# Altium PCB PCB.PcbDoc (part 1 of 2)
Units mm, origin at the board's own origin, x right, y up, seen from the top; angles counter-clockwise.
Board outline 200.03 x 130.81 mm, 2 copper layers (Top Layer, Bottom Layer); 172 components, 135 nets, 513 pads, 0 vias.
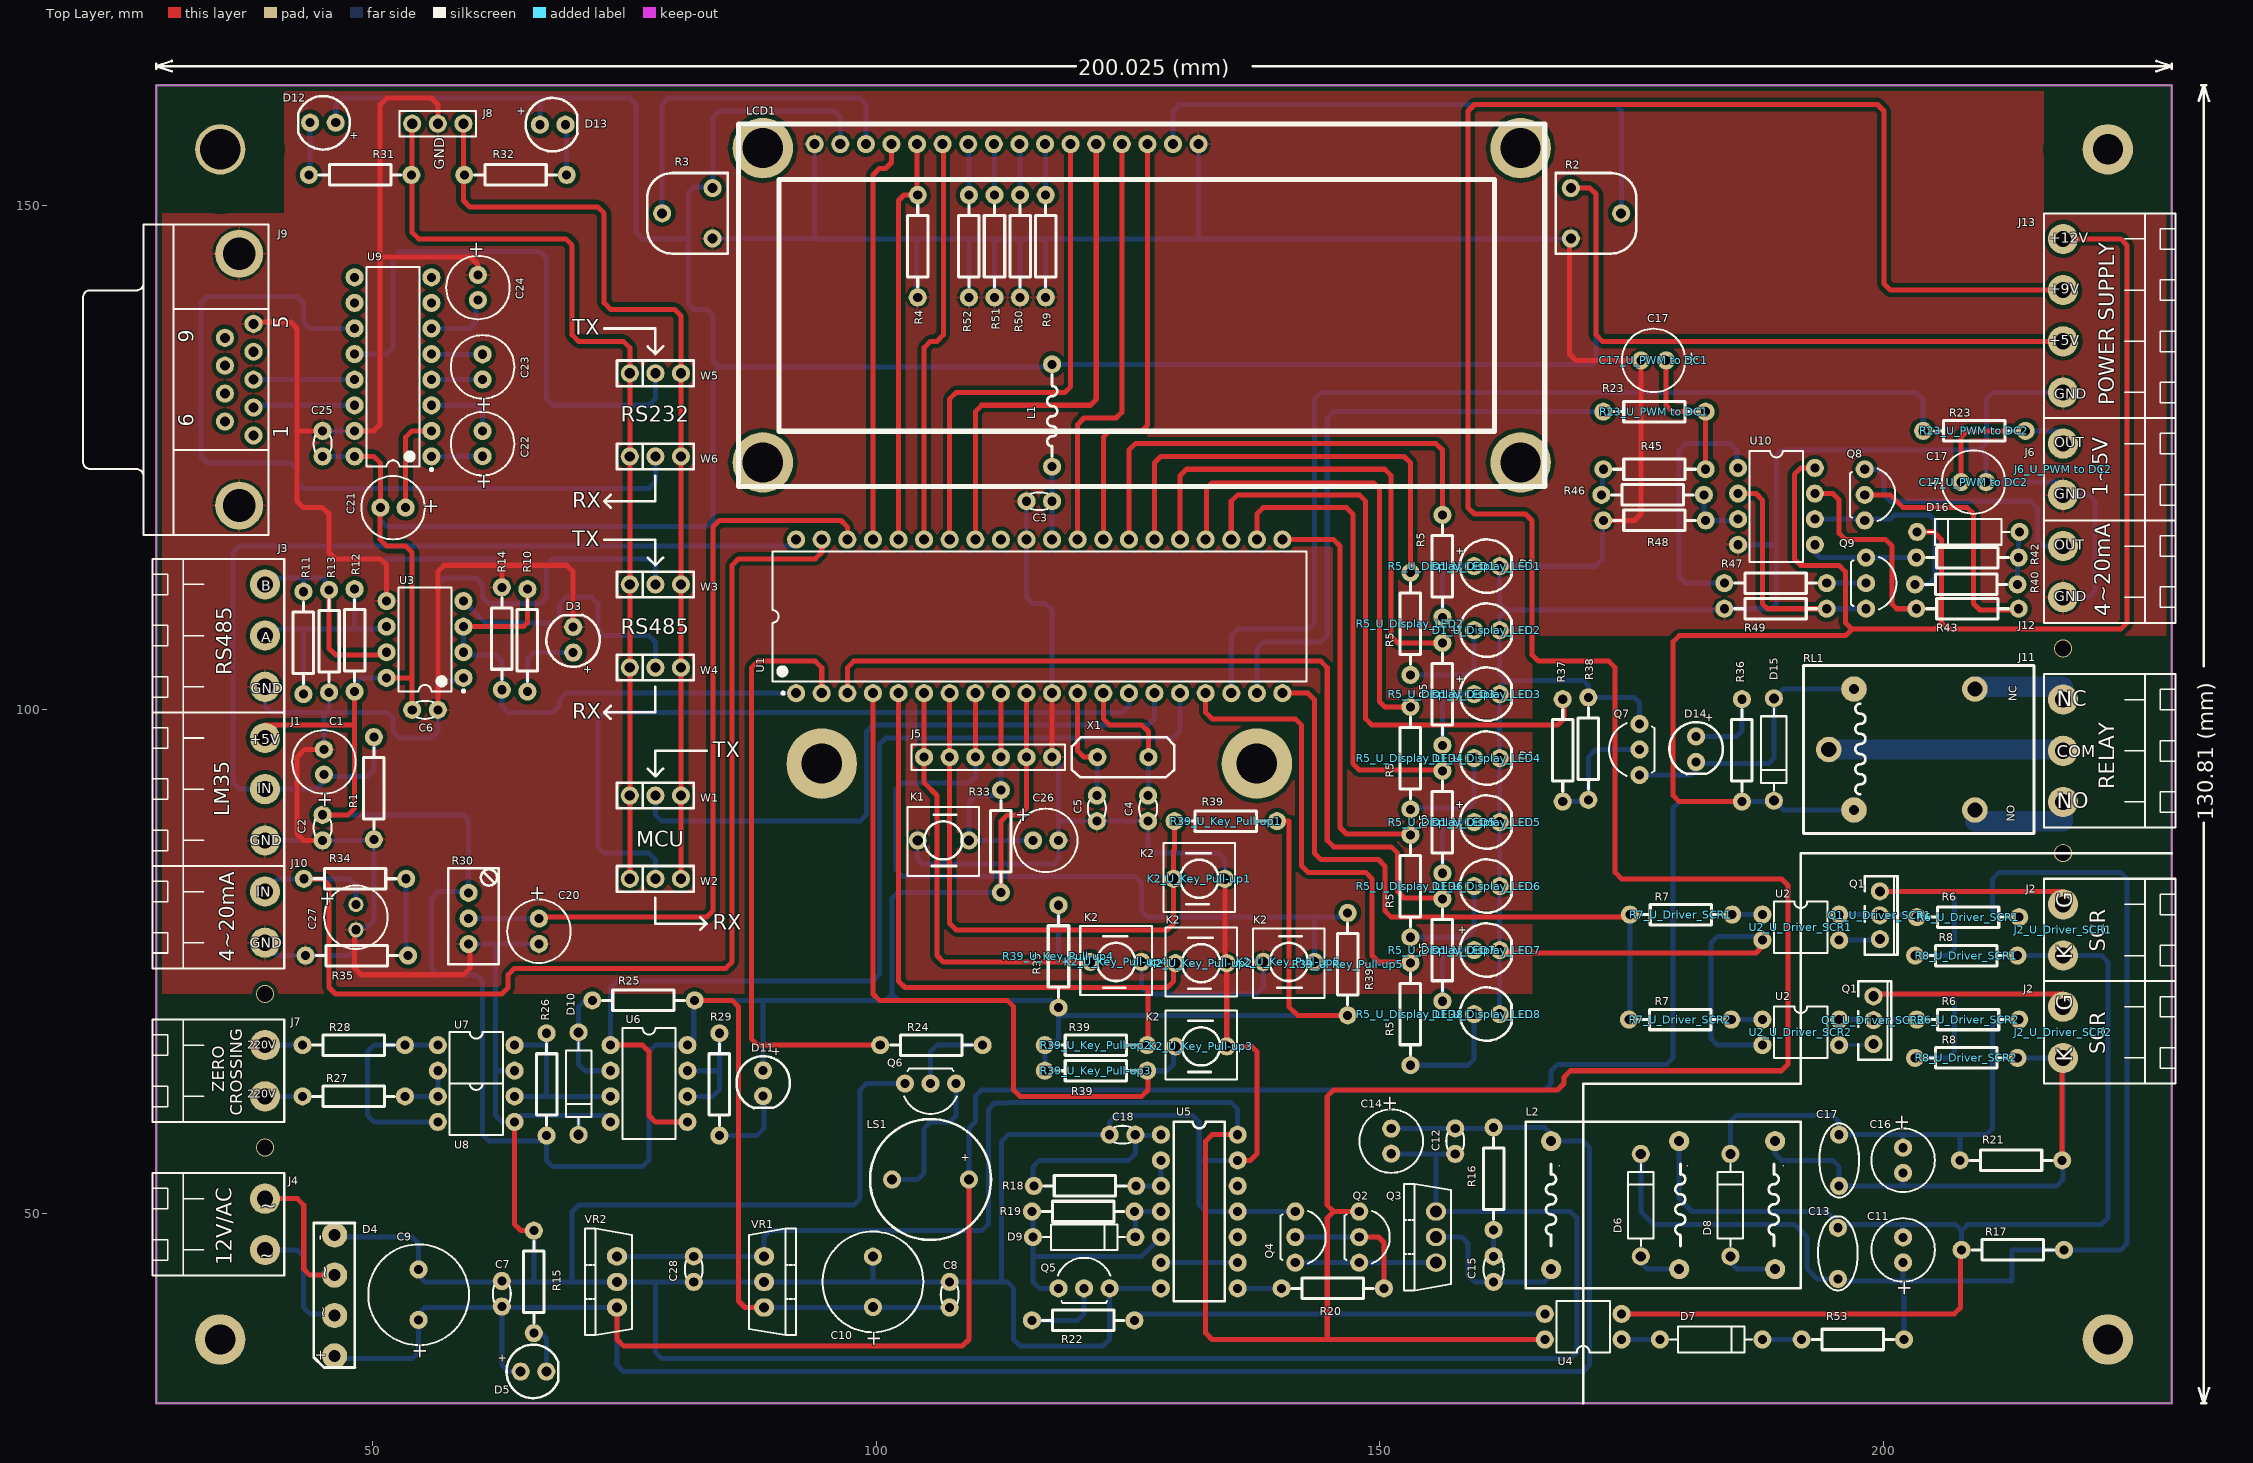
[diagram p0: Top Layer view]
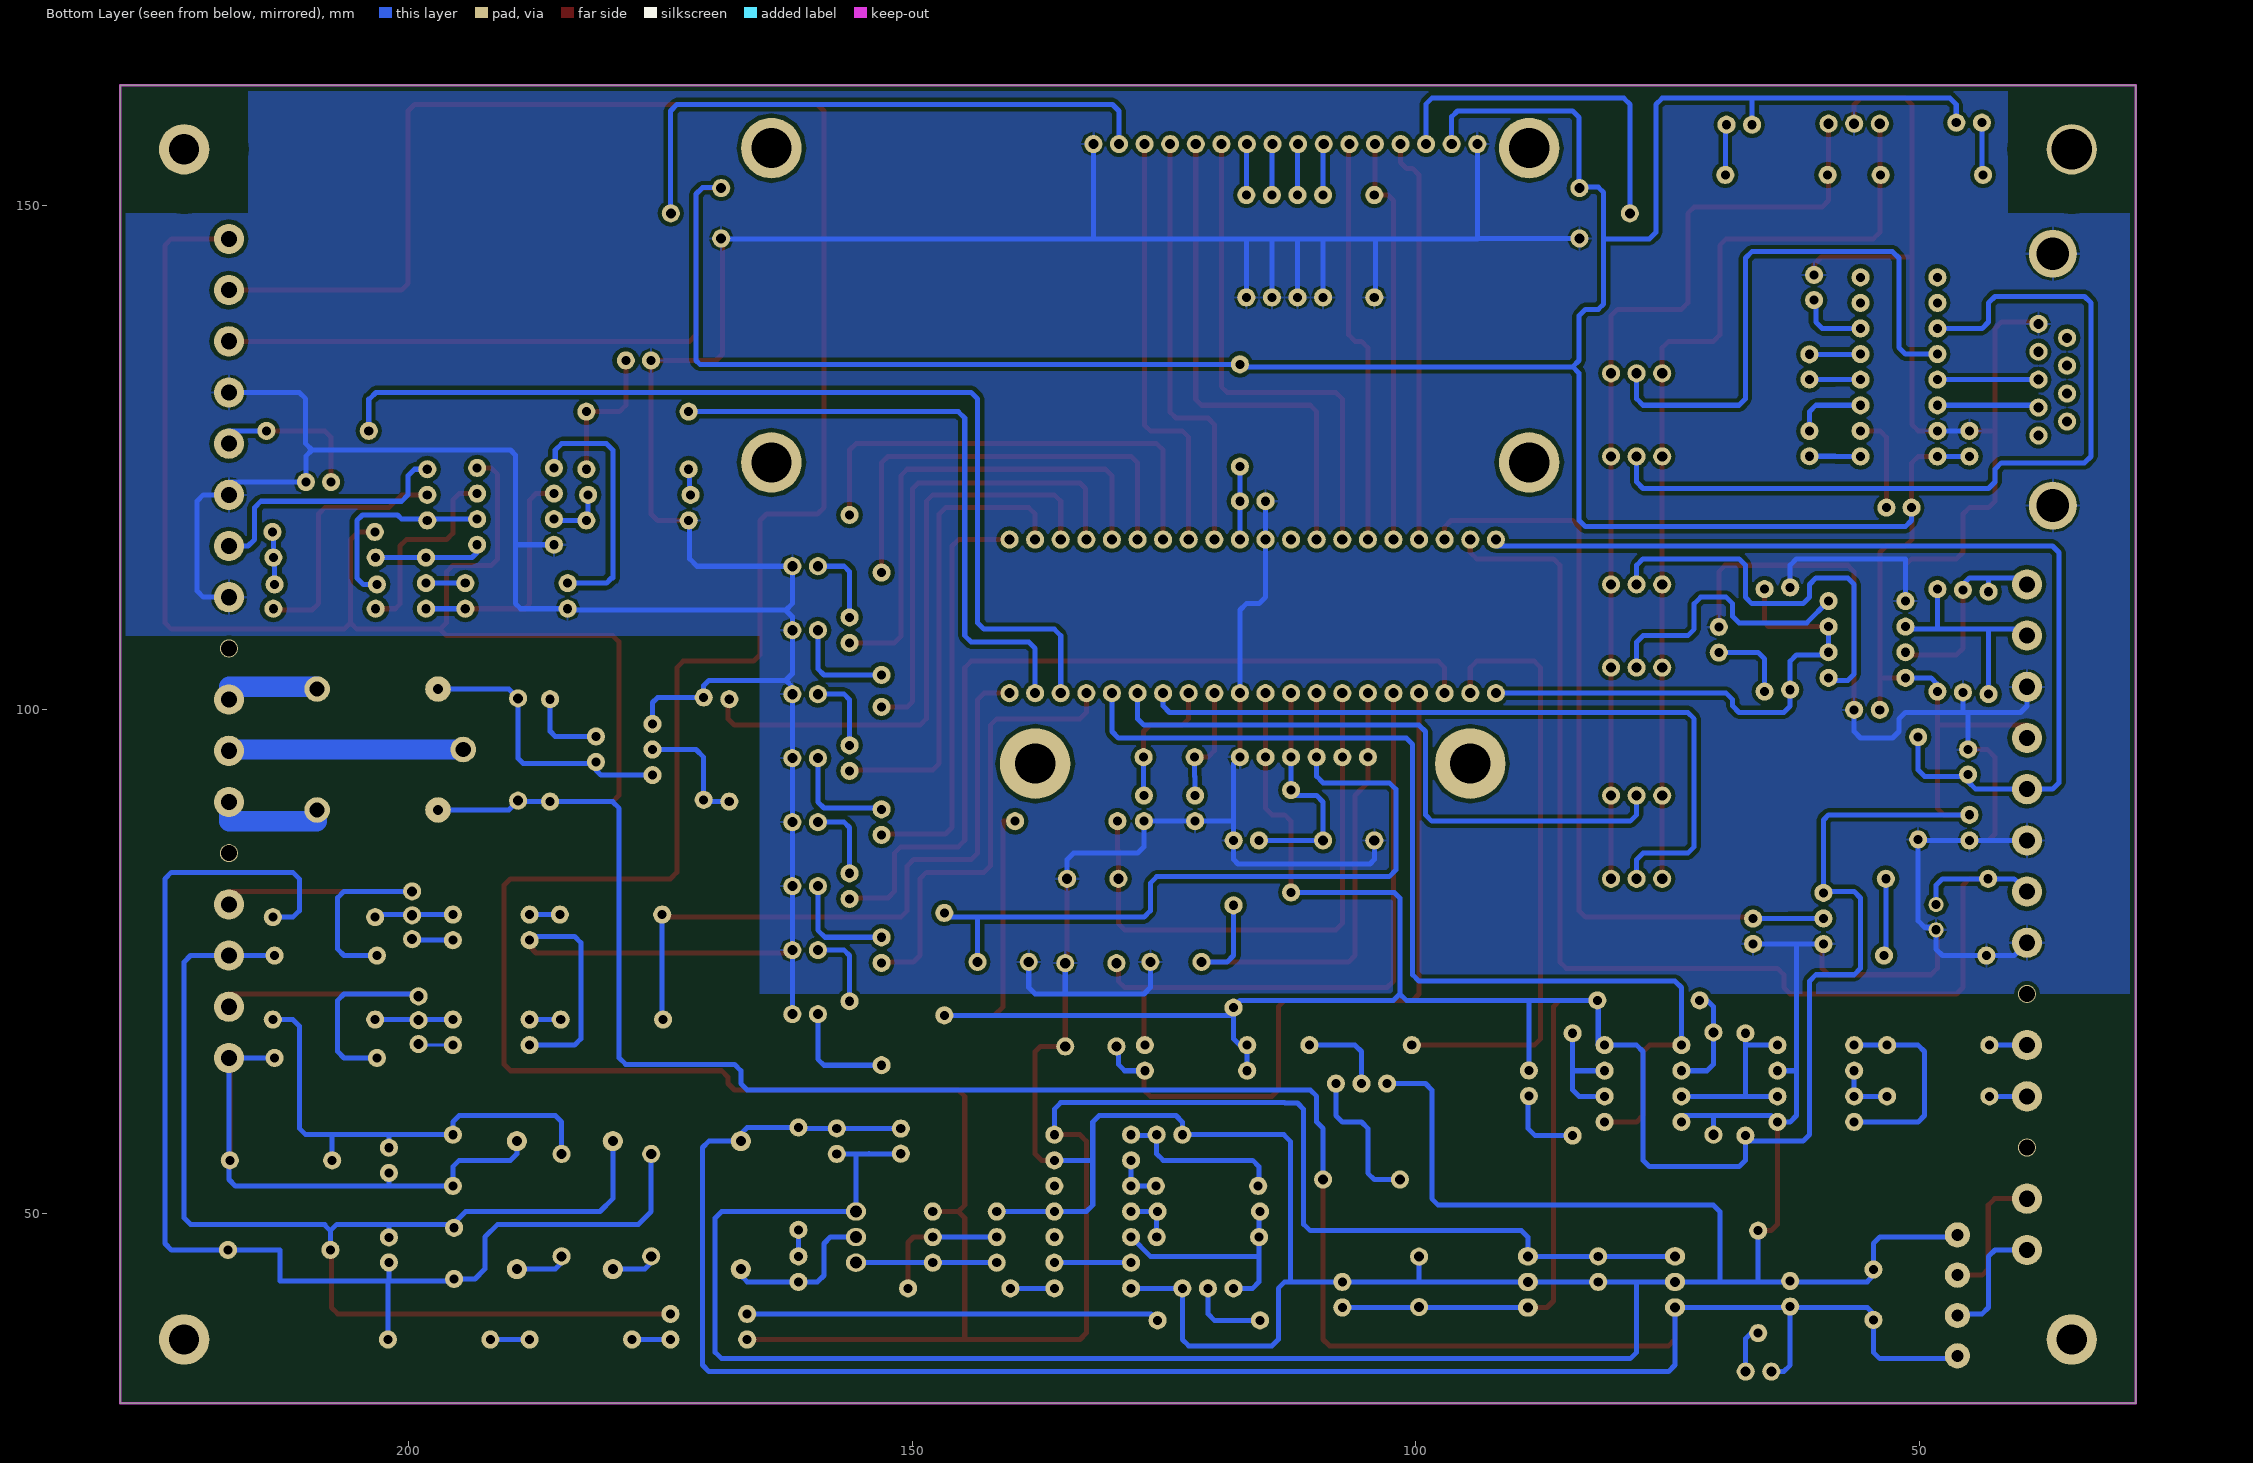
[diagram p1: Bottom Layer view, seen from below]
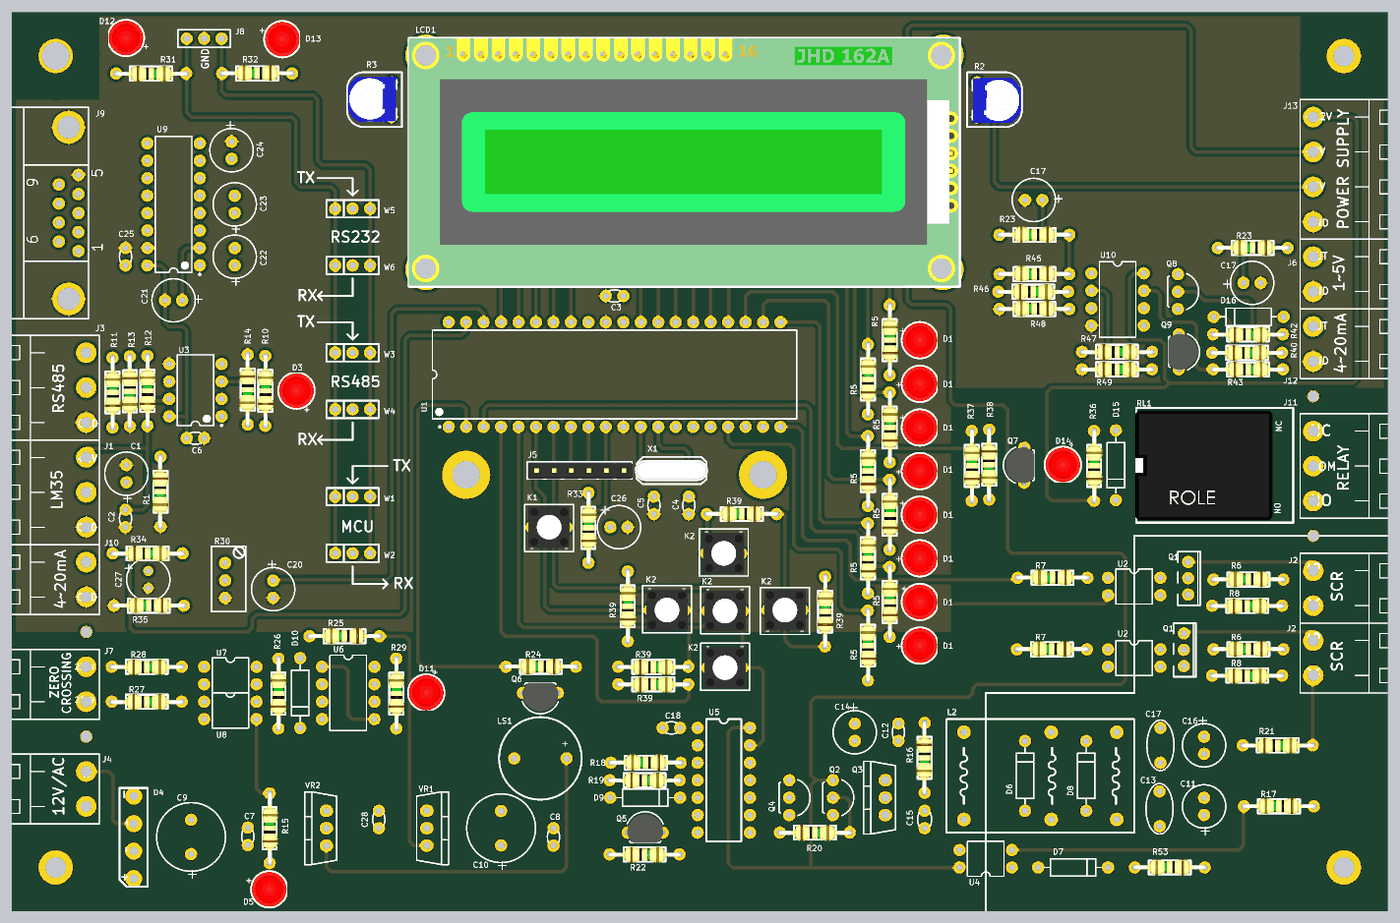
[diagram p3: 3D render of the assembled board from above, using the file's embedded part models]

## Layer stack, top to bottom
Top Solder: solder mask 0.0102, Solder Resist, Dk 3.5
Top Layer: signal copper 0.0356
Dielectric 1: dielectric 0.32, FR-4, Dk 4.8
Bottom Layer: signal copper 0.0356
Bottom Solder: solder mask 0.0102, Solder Resist, Dk 3.5

## Board outline
28.575,31.115 228.6,31.115 228.6,161.925 28.575,161.925

## Design rules (kind name [scope] priority, off if disabled: settings)
Clearance [All] p1: gap=0.4
ComponentClearance [All] p1: gap=0 collisioncheckmode=3 verticalgap=0 showdistances=FALSE
Height [All] p1: minheight=0 maxheight=50 prefheight=12.7
PolygonConnect [All] p1: connectstyle=Relief reliefconductorwidth=0.254 reliefentries=4 polygonreliefangle="90 Angle" airgapwidth=0.254
RoutingVias [All] p1: holewidth=0.711 width=1.27 viastyle="Through Hole" minholewidth=0.711 minwidth=1.27 maxholewidth=0.711 maxwidth=1.27
SolderMaskExpansion [All] p1: expansion=0.102
Width Width_2 [(InNet('NetJ11_3') OR InNet('NetJ11_2') OR InNet('NetJ11_1') )] p1: maxlimit=2 minlimit=2 preferedwidth=2
Width Width_1 [(InNet('NetD4_4') OR InNet('NetD4_2') OR InNet('GND') OR InNet('+12V') OR InNet('NetVR1_1') OR InNet('+5V') OR InNet('VCC') OR InNet('NetC15_1') OR InNet('GND2_U_Driver_SCR1') OR InNet('L2') OR InNet('VDD2_U_Driver_SCR1') OR InNet('GND2') OR InNet('NetD8_1') OR InNet('VDD2') OR InNet('NetD6_1') OR InNet('NetJ2_U_Driver_SCR2_2') OR InNet('NetQ1_U_Driver_SCR2_C') OR InNet('NetJ2_U_Driver_SCR1_2') OR InNet('NetQ1_U_Driver_SCR1_B') OR InNet('NetQ1_U_Driver_SCR1_C') )] p2: maxlimit=0.5 minlimit=0.5 preferedwidth=0.5
Width [All] p3: maxlimit=0.5 minlimit=0.5 preferedwidth=0.5
28 further rules are at their usual default settings.

## Classes and differential pairs
component class "U_Converter_Voltage to Current": D16 J12 Q8 Q9 R40 R42 R43 R45 R46 R47 R48 R49 U10
channel class "PWM to DC": "U_PWM to DC1" "U_PWM to DC2"
channel class Key_Pull-up: U_Key_Pull-up1 U_Key_Pull-up2 U_Key_Pull-up3 U_Key_Pull-up4 U_Key_Pull-up5
channel class Driver_SCR: U_Driver_SCR1 U_Driver_SCR2
channel class Display_LED: U_Display_LED1 U_Display_LED2 U_Display_LED3 U_Display_LED4 U_Display_LED5 U_Display_LED6 U_Display_LED7 U_Display_LED8
component class "U_Zero Crossing": D10 D11 J7 R25 R26 R27 R28 R29 U6 U7 U8
component class U_Sounder_Buzzer: LS1 Q6 R24
component class "U_PWM to DC2": "C17_U_PWM to DC2" "J6_U_PWM to DC2" "R23_U_PWM to DC2"
component class "U_PWM to DC1": "C17_U_PWM to DC1" "R23_U_PWM to DC1"
component class "U_Programer Connectors_SPI": J5
component class "U_Power Supply": C7 C8 C9 C10 C11 C12 C13 C14 C15 C16 C17 C18 C28 D4 D5 D6 D7 D8 D9 J4 J13 L2 Q2 Q3 Q4 Q5 R15 R16 R17 R18 R19 R20 R21 R22 R53 U4 U5 VR1 VR2
component class U_Potentiometer: C20 R30
component class U_LM35: C1 C2 J1 R1
component class U_Key_Reset: C26 K1 R33
component class U_Key_Pull-up5: K2_U_Key_Pull-up5 R39_U_Key_Pull-up5
component class U_Key_Pull-up4: K2_U_Key_Pull-up4 R39_U_Key_Pull-up4
component class U_Key_Pull-up3: K2_U_Key_Pull-up3 R39_U_Key_Pull-up3
component class U_Key_Pull-up2: K2_U_Key_Pull-up2 R39_U_Key_Pull-up2
component class U_Key_Pull-up1: K2_U_Key_Pull-up1 R39_U_Key_Pull-up1
component class U_Interface_RS485: C6 D3 J3 R10 R11 R12 R13 R14 U3
component class U_Interface_RS232: C21 C22 C23 C24 C25 J9 U9
component class U_Interface_BUS: D12 D13 J8 R31 R32 W1 W2 W3 W4 W5 W6
component class U_Driver_SCR2: J2_U_Driver_SCR2 Q1_U_Driver_SCR2 R6_U_Driver_SCR2 R7_U_Driver_SCR2 R8_U_Driver_SCR2 U2_U_Driver_SCR2
component class U_Driver_SCR1: J2_U_Driver_SCR1 Q1_U_Driver_SCR1 R6_U_Driver_SCR1 R7_U_Driver_SCR1 R8_U_Driver_SCR1 U2_U_Driver_SCR1
component class U_Driver_Relay_SPDT: D14 D15 J11 Q7 R36 R37 R38 RL1
component class U_Display_LED8: D1_U_Display_LED8 R5_U_Display_LED8
component class U_Display_LED7: D1_U_Display_LED7 R5_U_Display_LED7
component class U_Display_LED6: D1_U_Display_LED6 R5_U_Display_LED6
component class U_Display_LED5: D1_U_Display_LED5 R5_U_Display_LED5
component class U_Display_LED4: D1_U_Display_LED4 R5_U_Display_LED4
component class U_Display_LED3: D1_U_Display_LED3 R5_U_Display_LED3
component class U_Display_LED2: D1_U_Display_LED2 R5_U_Display_LED2
component class U_Display_LED1: D1_U_Display_LED1 R5_U_Display_LED1
component class U_Display_LCD16x2: LCD1 R2 R3 R4 R9 R50 R51 R52
component class U_Crystal: C4 C5 X1
component class "U_Converter_Current to Voltage": C27 J10 R34 R35
component class U_AVCC: C3 L1
component class U_ATmega16_DIP: U1

## Components (designator, comment, footprint, x,y, rotation, side; value= is the part's Value field where it differs from the comment)
C1 "Capacitor" CAPPR2.5-6.3x5#1 45.212,94.779 r90 top
C2 "Capacitor" CAPNTO2.54-3.05x1.78A 45.085,88.265 r270 top
C3 "Cap" CAPNTO2.54-3.05x1.78A 116.205,120.65 r180 top
C4 "Cap" CAPNTO2.54-3.05x1.78A 127,90.17 r270 top
C5 "Cap" CAPNTO2.54-3.05x1.78A 121.92,90.17 r270 top
C6 "Cap" CAPNTO2.54-3.05x1.78A 55.245,99.949 r0 top
C7 "Cap" CAPNTO2.54-3.05x1.78A 62.865,42 r270 top
C8 "Cap" CAPNTO2.54-3.05x1.78A 107.315,41.91 r270 top
C9 "Cap Pol1" CAPPR5-10x12.5#1 54.61,41.91 r90 top
C10 "Cap Pol1" CAPPR5-10x12.5#2 99.695,43.18 r90 top
C11 "Cap Pol1" CAPPR2.5-6.3x5#1 201.93,46.355 r90 top
C12 "Cap" CAPNTO2.54-3.05x1.78A 157.48,57.15 r90 top
C13 "Cap" CAPNTO5.08-7.37x3.94 195.455,46.01 r270 top
C14 "Cap Pol1" CAPPR2.5-6.3x5#1 151.13,57.15 r270 top
C15 "Cap" CAPNTO2.54-3.56x2.03 161.29,44.45 r90 top
C16 "Cap Pol1" CAPPR2.5-6.3x5#1 201.93,55.245 r270 top
C17 "Cap" CAPNTO5.08-7.37x3.94 195.58,55.245 r90 top
"C17_U_PWM to DC1" "C17" CAPPR2.5-6.3x5#1 177.165,134.62 r180 top (schematic designator C17)
"C17_U_PWM to DC2" "C17" CAPPR2.5-6.3x5#1 208.915,122.555 r0 top (schematic designator C17)
C18 "Cap" CAPNTO2.54-3.05x1.78A 124.46,57.785 r0 top
C20 "C18" CAPPR2.5-6.3x5#1 66.548,77.978 r270 top
C21 "C18" CAPPR2.5-6.3x5#1 52.07,120.015 r180 top
C22 "C18" CAPPR2.5-6.3x5#1 60.96,126.365 r90 top
C23 "C18" CAPPR2.5-6.3x5#1 60.96,133.985 r90 top
C24 "C18" CAPPR2.5-6.3x5#1 60.5,141.859 r270 top
C25 "Cap" CAPNTO2.54-3.05x1.78A 45.085,126.365 r90 top
C26 "Cap Pol1" CAPPR2.5-6.3x5#1 116.84,86.995 r0 top
C27 "Cap Pol1" CAPPR2.5-6.3x5#2 48.387,79.375 r270 top
C28 "Cap" CAPNTO2.54-3.05x1.78A 81.915,44.45 r90 top
D1_U_Display_LED1 "D1" LED-5mm_Red#1 160.655,114.3 r0 top (schematic designator D1)
D1_U_Display_LED2 "D1" LED-5mm_Red#1 160.655,107.95 r0 top (schematic designator D1)
D1_U_Display_LED3 "D1" LED-5mm_Red#1 160.655,101.6 r0 top (schematic designator D1)
D1_U_Display_LED4 "D1" LED-5mm_Red#1 160.655,95.25 r0 top (schematic designator D1)
D1_U_Display_LED5 "D1" LED-5mm_Red#1 160.655,88.9 r0 top (schematic designator D1)
D1_U_Display_LED6 "D1" LED-5mm_Red#1 160.655,82.55 r0 top (schematic designator D1)
D1_U_Display_LED7 "D1" LED-5mm_Red#1 160.655,76.2 r0 top (schematic designator D1)
D1_U_Display_LED8 "D1" LED-5mm_Red#1 160.655,69.85 r0 top (schematic designator D1)
D3 "LED" LED-5mm_Red#2 69.85,106.934 r90 top
D4 "Bridge_1" KBP 46.355,41.91 r90 top
D5 "LED" LED-5mm_Red#1 66.04,34.38 r0 top
D6 "UF4007" DIODE-0.4#1 175.895,50.8 r90 top
D7 "D Zener" DIODE-0.4#2 182.88,37.465 r0 top
D8 "UF4007" DIODE-0.4#1 184.785,50.8 r90 top
D9 "1N4148" DIODE-0.4#2 120.65,47.625 r0 top
D10 "1N4001" DIODE-0.4#1 70.485,62.865 r270 top
D11 "LED" LED-5mm_Red#2 88.9,62.865 r270 top
D12 "LED" LED-5mm_Red#2 45.085,158.115 r180 top
D13 "LED" LED-5mm_Red#2 67.945,158.115 r0 top
D14 "LED" LED-5mm_Red#2 181.483,96.012 r270 top
D15 "Diode" DIODE-0.4#1 189.103,96.012 r270 top
D16 "D Zener" DIODE-0.4#2 208.407,117.602 r180 top
J1 "Header" Fonics_3PIN_1 39.37,92.075 r270 top
J2_U_Driver_SCR1 "J2" Fonics_2PIN_1 217.805,78.105 r90 top (schematic designator J2)
J2_U_Driver_SCR2 "J2" Fonics_2PIN_1 217.805,67.945 r90 top (schematic designator J2)
J3 "Header 3" Fonics_3PIN_1 39.37,107.315 r270 top
J4 "Header 2" Fonics_2PIN_1 39.37,48.895 r270 top
J5 "Header 6" HDR1X6 104.775,95.25 r0 top
"J6_U_PWM to DC2" "J6" Fonics_2PIN_1 217.805,123.825 r90 top (schematic designator J6)
J7 "Header 2" Fonics_2PIN_1 39.37,64.135 r270 top
J8 "Header 3" HDR1X3 53.975,158.115 r0 top
J9 "D Connector 9" DSUB1.385-2H9 27.305,132.715 r90 top
J10 "Header 2" Fonics_2PIN_1 39.37,79.375 r270 top
J11 "Header 3" Fonics_3PIN_1 217.805,95.885 r90 top
J12 "Header 2" Fonics_2PIN_1 217.805,113.665 r90 top
J13 "Header 4" Fonics_4PIN_1 217.805,139.065 r90 top
K1 "SW-PB" SPST-2_2 106.68,86.995 r0 top
K2_U_Key_Pull-up1 "K2" SPST-2_2 132.08,83.185 r180 top (schematic designator K2)
K2_U_Key_Pull-up2 "K2" SPST-2_2 132.268,74.805 r180 top (schematic designator K2)
K2_U_Key_Pull-up3 "K2" SPST-2_2 132.268,66.55 r180 top (schematic designator K2)
K2_U_Key_Pull-up4 "K2" SPST-2_2 123.825,74.93 r180 top (schematic designator K2)
K2_U_Key_Pull-up5 "K2" SPST-2_2 140.97,74.93 r0 top (schematic designator K2)
L1 "Inductor" Inductor_1 117.475,129.54 r270 top
L2 "Inductor 3" INDUCTOR3 186.055,41.275 r0 top
LCD1 "LCD_16*2" LCD_2x16 126.365,140.298 r0 top
LS1 "Buzzer" RB_7.62mm 105.41,53.34 r0 top
Q1_U_Driver_SCR1 "Q1" SOT-32 198.12,83.439 r270 top (schematic designator Q1)
Q1_U_Driver_SCR2 "Q1" SOT-32 197.485,73.025 r270 top (schematic designator Q1)
Q2 "NPN" TO92C 147.955,47.625 r0 top
Q3 "IRF540" TO220V#1 155.575,47.625 r90 top
Q4 "BC557" TO92C 141.605,47.625 r0 top
Q5 "NPN" TO92C 120.65,42.545 r90 top
Q6 "NPN" TO92C 105.41,62.865 r270 top
Q7 "NPN" TO92C 175.768,96.012 r180 top
Q8 "PNP" TO92C 198.12,121.285 r0 top
Q9 "NPN" TO92C 198.247,112.522 r0 top
R1 "Resistor" AXIAL-0.4 50.165,93.345 r270 top
R2 "RPot1" VR8-5/5.6MM 171.45,149.225 r270 top
R3 "RPot1" VR8-5/5.6MM 81.28,149.225 r90 top
R4 "Res1" AXIAL-0.4 104.14,144.78 r90 top
R5_U_Display_LED1 "R5" AXIAL-0.4 156.21,113.03 r90 top (schematic designator R5)
R5_U_Display_LED2 "R5" AXIAL-0.4 153.035,107.315 r90 top (schematic designator R5)
R5_U_Display_LED3 "R5" AXIAL-0.4 156.21,100.33 r90 top (schematic designator R5)
R5_U_Display_LED4 "R5" AXIAL-0.4 153.035,93.98 r90 top (schematic designator R5)
R5_U_Display_LED5 "R5" AXIAL-0.4 156.21,87.63 r90 top (schematic designator R5)
R5_U_Display_LED6 "R5" AXIAL-0.4 153.035,81.28 r90 top (schematic designator R5)
R5_U_Display_LED7 "R5" AXIAL-0.4 156.21,74.93 r90 top (schematic designator R5)
R5_U_Display_LED8 "R5" AXIAL-0.4 153.035,68.58 r90 top (schematic designator R5)
R6_U_Driver_SCR1 "R6" AXIAL-0.4 209.55,79.375 r180 top (schematic designator R6)
R6_U_Driver_SCR2 "R6" AXIAL-0.4 209.55,69.215 r180 top (schematic designator R6)
R7_U_Driver_SCR1 "R7" AXIAL-0.4 181.065,79.629 r180 top (schematic designator R7)
R7_U_Driver_SCR2 "R7" AXIAL-0.4 180.975,69.215 r180 top (schematic designator R7)
R8_U_Driver_SCR1 "R8" AXIAL-0.4 207.01,75.565 r0 top (schematic designator R8)
R8_U_Driver_SCR2 "R8" AXIAL-0.4 207.01,65.405 r0 top (schematic designator R8)
R9 "Res1" AXIAL-0.4 116.84,144.78 r90 top
R10 "Resistor" AXIAL-0.4 65.405,105.664 r90 top
R11 "Res1" AXIAL-0.4 43.18,105.41 r90 top
R12 "Res1" AXIAL-0.4 48.26,105.664 r90 top
R13 "Res1" AXIAL-0.4 45.72,107.95 r270 top
R14 "Res1" AXIAL-0.4 62.865,108.204 r270 top
R15 "Res1" AXIAL-0.4 66.04,42 r90 top
R16 "Res1" AXIAL-0.4 161.29,54.61 r270 top
R17 "Res1" AXIAL-0.4 213.995,46.355 r180 top
R18 "Res1" AXIAL-0.4 121.92,52.705 r180 top
R19 "Res1" AXIAL-0.4 119.38,50.165 r0 top
R20 "Res1" AXIAL-0.4 144.145,42.545 r0 top
R21 "Res1" AXIAL-0.4 211.455,55.245 r0 top
R22 "Res1" AXIAL-0.4 119.38,39.37 r0 top
"R23_U_PWM to DC1" "R23" AXIAL-0.4 178.435,129.54 r180 top (schematic designator R23)
"R23_U_PWM to DC2" "R23" AXIAL-0.4 210.185,127.635 r180 top (schematic designator R23)
R24 "Res1" AXIAL-0.4 106.68,66.675 r180 top
R25 "Res1" AXIAL-0.4 78.105,71.12 r180 top
R26 "Res1" AXIAL-0.4 67.31,61.595 r90 top
R27 "Res1" AXIAL-0.4 46.99,61.595 r0 top
R28 "Res1" AXIAL-0.4 46.99,66.675 r0 top
R29 "Resistor" AXIAL-0.4 84.455,61.595 r90 top
R30 "POT" VR4_ 59.563,79.248 r90 top
R31 "Resistor" AXIAL-0.4 47.625,153.035 r0 top
R32 "Resistor" AXIAL-0.4 65.405,153.035 r180 top
R33 "Res1" AXIAL-0.4 112.395,85.725 r90 top
R34 "Res1" AXIAL-0.4 47.117,83.185 r0 top
R35 "Res1" AXIAL-0.4 49.657,75.565 r180 top
R36 "Resistor" AXIAL-0.4 185.928,94.742 r90 top
R37 "Resistor" AXIAL-0.4 168.148,94.742 r90 top
R38 "Resistor" AXIAL-0.4 170.688,97.282 r270 top
R39_U_Key_Pull-up1 "R39" AXIAL-0.4 135.89,88.9 r180 top (schematic designator R39)
R39_U_Key_Pull-up2 "R39" AXIAL-0.4 120.65,66.675 r0 top (schematic designator R39)
R39_U_Key_Pull-up3 "R39" AXIAL-0.4 120.65,64.135 r0 top (schematic designator R39)
R39_U_Key_Pull-up4 "R39" AXIAL-0.4 118.11,74.295 r90 top (schematic designator R39)
R39_U_Key_Pull-up5 "R39" AXIAL-0.4 146.81,73.535 r90 top (schematic designator R39)
R40 "Res1" AXIAL-0.4 207.01,112.395 r0 top
R42 "Res1" AXIAL-0.4 207.137,115.062 r0 top
R43 "Res1" AXIAL-0.4 207.137,109.982 r0 top
R45 "Res1" AXIAL-0.4 178.435,123.825 r180 top
R46 "Res1" AXIAL-0.4 175.895,121.285 r0 top
R47 "Res1" AXIAL-0.4 188.087,112.522 r0 top
R48 "Res1" AXIAL-0.4 178.435,118.745 r180 top
R49 "Res1" AXIAL-0.4 188.087,109.982 r0 top
R50 "Res1" AXIAL-0.4 114.3,144.78 r90 top
R51 "Res1" AXIAL-0.4 111.76,144.78 r90 top
R52 "Res1" AXIAL-0.4 109.22,144.78 r90 top
R53 "Res1" AXIAL-0.4 198.12,37.465 r180 top
RL1 "RL1" RELAY-SPDT-1 201.803,96.012 r90 top
U1 "ATmega16-16PC" 40P6 116.205,109.22 r90 top
U2_U_Driver_SCR1 "U2" DIP-4 191.77,78.359 r270 top (schematic designator U2)
U2_U_Driver_SCR2 "U2" DIP-4 191.77,67.945 r270 top (schematic designator U2)
U3 "MAX485CPA" PA8 55.245,106.934 r180 top
U4 "Optoisolator" DIP-4 170.18,38.735 r90 top
U5 "U?" DIP14 132.08,50.165 r0 top
U6 "LM358J" 693-02 77.47,62.865 r270 top
U7 "Optoisolator" DIP-4 60.325,65.405 r270 top
U8 "Optoisolator" DIP-4 60.325,60.325 r270 top
U9 "MAX232ACPE" PE16A 52.07,133.985 r180 top
U10 "LM358J" 693-02 189.357,120.142 r270 top
VR1 "Volt Reg" TO220V#2 88.9,43.18 r270 top
VR2 "Volt Reg" TO220V#2 74.295,43.18 r90 top
W1 "Jumper 3pin" SIP3 78.105,91.44 r0 top
W2 "Jumper 3pin" SIP3 78.105,83.185 r0 top
W3 "Jumper 3pin" SIP3 78.105,112.395 r0 top
W4 "Jumper 3pin" SIP3 78.105,104.14 r0 top
W5 "Jumper 3pin" SIP3 78.105,133.35 r0 top
W6 "Jumper 3pin" SIP3 78.105,125.095 r0 top
X1 "11.0592MHz" XTAL_1 124.46,95.25 r0 top

## Footprints (in the part's own frame and the unit in brackets; to place one, negate y for a bottom-side part, rotate by r counter-clockwise, add the part's x,y. Pads: shape width x height; smd on the part's side, far side on the other; paste and mask are expansions set on the pad)
40P6 [mm] "DIP, 40-Leads, Row Spacing 15.24mm, Pitch 2.54mm, Body 52.2x13.95mm"
  round 1.8 hole 1: 1(-7.62,24.13) 2(-7.62,21.59) 3(-7.62,19.05) 4(-7.62,16.51) 5(-7.62,13.97) 6(-7.62,11.43) 7(-7.62,8.89) 8(-7.62,6.35) 9(-7.62,3.81) 10(-7.62,1.27) 11(-7.62,-1.27) 12(-7.62,-3.81) 13(-7.62,-6.35) 14(-7.62,-8.89) 15(-7.62,-11.43) 16(-7.62,-13.97) 17(-7.62,-16.51) 18(-7.62,-19.05) 19(-7.62,-21.59) 20(-7.62,-24.13) 21(7.62,-24.13) 22(7.62,-21.59) 23(7.62,-19.05) 24(7.62,-16.51) 25(7.62,-13.97) 26(7.62,-11.43) 27(7.62,-8.89) 28(7.62,-6.35) 29(7.62,-3.81) 30(7.62,-1.27) 31(7.62,1.27) 32(7.62,3.81) 33(7.62,6.35) 34(7.62,8.89) 35(7.62,11.43) 36(7.62,13.97) 37(7.62,16.51) 38(7.62,19.05) 39(7.62,21.59) 40(7.62,24.13)
  silkscreen extent -7.74,-26.5 6.45,26.5, body extent -7.05,-26.47 7.05,26.47, height 4.83
693-02 [mm] "DIP; 8 Leads; Row Spacing 7.62 mm; Pitch 2.54 mm"
  round 1.8 hole 0.9: 1(-3.81,-3.81) 2(-1.27,-3.81) 3(1.27,-3.81) 4(3.81,-3.81) 5(3.81,3.81) 6(1.27,3.81) 7(-1.27,3.81) 8(-3.81,3.81)
  silkscreen extent -5.5,-2.65 5.5,2.65
AXIAL-0.4 [mm]
  round 1.8 hole 0.9: 1(-3.9,0) 2(6.26,0)
  silkscreen extent -2.88,-1.02 5.24,1.02, body extent -4.19,-1.19 6.58,1.12, height 3.51
CAPNTO2.54-3.05x1.78A [mm] "Capacitor, Radial, Tantalum, Non-Polarised; Body 3.05 x 1.78 x 3.43 mm (WxTxH max); Pin Spacing 2.54 mm (typ)"
  round 1.8 hole 0.9: 1(-1.27,0) 2(1.27,0)
  silkscreen extent -0.8,-0.89 0.8,0.89
CAPNTO2.54-3.56x2.03 [mm] "Capacitor, Radial, Tantalum, Non-Polarised; Body 3.56 x 2.03 x 5.08 mm (WxTxH max); Pin Spacing 2.54 mm (typ)"
  round 1.8 hole 0.9: 1(-1.27,0) 2(1.27,0)
  silkscreen extent -0.98,-1.02 0.98,1.02
CAPNTO5.08-7.37x3.94 [mm] "Capacitor, Radial, Tantalum, Non-Polarised; Body 7.37 x 3.94 x 6.86 mm (WxTxH max); Pin Spacing 5.08 mm (typ)"
  round 1.8 hole 0.9: 1(-2.54,0) 2(2.54,0)
  silkscreen extent -3.68,-1.98 3.68,1.96
CAPPR2.5-6.3x5#1 [mm] "Capacitor, Electrolytic, Radial; Body 6.3 x 5 mm (Dia.xH typ); Pin Spacing 2.5 mm (typ)"
  round 1.8 hole 0.9: 1(-1.25,0) 2(1.25,0)
  silkscreen extent -3.15,-3.15 3.15,3.15
CAPPR2.5-6.3x5#2 [mm] "Capacitor, Electrolytic, Radial; Body 6.3 x 5 mm (Dia.xH typ); Pin Spacing 2.5 mm (typ)"
  round 1.5 hole 0.9: 1(-1.25,0) 2(1.25,0)
  silkscreen extent -3.15,-3.15 3.15,3.15
CAPPR5-10x12.5#1 [mm] "Capacitor, Electrolytic, Radial; Body 10 x 12.5 mm (Dia.xH typ); Pin Spacing 5 mm (typ)"
  round 1.8 hole 0.9: 1(-2.5,0) 2(2.5,0)
  silkscreen extent -5,-5 5,5
CAPPR5-10x12.5#2 [mm] "Capacitor, Electrolytic, Radial; Body 10 x 12.5 mm (Dia.xH typ); Pin Spacing 5 mm (typ)"
  round 1.8 hole 1: 1(-2.5,0) 2(2.5,0)
  silkscreen extent -5,-5 5,5
DIODE-0.4#1 [mm]
  round 1.8 hole 1: 1(-5.08,0) 2(5.08,0)
  silkscreen extent -4.06,-1.27 4.06,1.27
DIODE-0.4#2 [mm]
  round 1.8 hole 0.9: 1(-5.08,0) 2(5.08,0)
  silkscreen extent -4.06,-1.27 4.06,1.27
DIP14 [mm]
  round 1.8 hole 0.9: 1(-3.81,7.62) 2(-3.81,5.08) 3(-3.81,2.54) 4(-3.81,0) 5(-3.81,-2.54) 6(-3.81,-5.08) 7(-3.81,-7.62) 8(3.81,-7.62) 9(3.81,-5.08) 10(3.81,-2.54) 11(3.81,0) 12(3.81,2.54) 13(3.81,5.08) 14(3.81,7.62)
  silkscreen extent -2.54,-8.89 2.54,8.89
DIP-4 [mm]
  round 1.8 hole 0.9: 1(-1.27,-3.81) 2(1.27,-3.81) 3(1.27,3.81) 4(-1.27,3.81)
  silkscreen extent -2.55,-2.65 2.55,2.65
DSUB1.385-2H9 [mm]
  round 1.8 hole 1: 1(-5.54,-10.92) 2(-2.77,-10.92) 3(0,-10.92) 4(2.77,-10.92) 5(5.54,-10.92) 6(-4.155,-8.08) 7(-1.385,-8.08) 8(1.385,-8.08) 9(4.155,-8.08)
  round 4.76 hole 3.26: 10(-12.495,-9.5) 11(12.495,-9.5)
  silkscreen extent -15.4,-12.4 15.4,6
Fonics_2PIN_1 [mm]
  round 3 hole 1.6: 1(-2.54,0) 2(2.54,0)
  silkscreen extent -5.08,-11.18 5.08,1.91
Fonics_3PIN_1 [mm]
  round 3 hole 1.6: 1(-5.08,0) 2(0,0) 3(5.08,0)
  silkscreen extent -7.62,-11.18 7.62,1.91
Fonics_4PIN_1 [mm]
  round 3 hole 1.6: 1(-7.62,0) 2(-2.54,0) 3(2.54,0) 4(7.62,0)
  silkscreen extent -10.16,-11.18 10.16,1.91
HDR1X3 [mm]
  round 1.8 hole 1: 1(0,0) 2(2.54,0) 3(5.08,0)
  silkscreen extent -1.27,-1.27 6.35,1.27
HDR1X6 [mm]
  round 1.8 hole 0.9: 1(0,0) 2(2.54,0) 3(5.08,0) 4(7.62,0) 5(10.16,0) 6(12.7,0)
  silkscreen extent -1.27,-1.27 13.97,1.27, body extent -1.19,-1.3 14.05,1.19, height 8.54
INDUCTOR3 [mm] "created by: M.Hariri (designer)"
  round 2 hole 1: 1(-19.05,15.875) 2(-19.05,3.175) 3(-6.35,15.875) 4(-6.35,3.175) 5(3.175,15.875) 6(3.175,3.175)
  silkscreen extent -21.59,1.27 5.71,17.78
Inductor_1 [mm]
  round 1.8 hole 0.9: 1(-4.7,0) 2(5.46,0)
  silkscreen extent -3.68,-0.48 4.44,0.51
KBP [mm]
  round 2.5 hole 1.2: 1(5.936,0.08) 2(-2.064,0.08) 3(-6.064,0.08) 4(1.936,0.08)
  silkscreen extent -7.22,-1.92 7.11,2.14
LCD_2x16 [mm]
  round 6 hole 4: 0(-37.6,-15.8) 0(-37.6,15.4) 0(37.6,-15.8) 0(37.6,15.4)
  round 1.8 hole 1: 1(-32.45,15.8) 2(-29.91,15.8) 3(-27.37,15.8) 4(-24.83,15.8) 5(-22.29,15.8) 6(-19.75,15.8) 7(-17.21,15.8) 8(-14.67,15.8) 9(-12.13,15.8) 10(-9.59,15.8) 11(-7.05,15.8) 12(-4.51,15.8) 13(-1.97,15.8) 14(0.57,15.8) 15(3.11,15.8) 16(5.65,15.8)
  silkscreen extent -40,-18.2 40,17.8, body extent -40.13,-18.15 39.87,17.85, height 25.6
LED-5mm_Red#1 [mm]
  round 1.8 hole 1: 1(-1.3,-0.1) 2(1.24,-0.1)
  silkscreen extent -2.71,-2.74 2.43,2.56, body extent -2.6,-2.64 2.48,2.46, height 9.6
LED-5mm_Red#2 [mm]
  round 1.8 hole 0.9: 1(-1.3,-0.1) 2(1.24,-0.1)
  silkscreen extent -2.71,-2.74 2.43,2.56, body extent -2.6,-2.64 2.48,2.46, height 9.6
PA8 [mm] "DIP, 8-Leads, Row Spacing 7.62mm, Pitch 2.54mm, Body 9.38x7.24mm"
  round 1.8 hole 0.9: 1(-3.81,3.81) 2(-3.81,1.27) 3(-3.81,-1.27) 4(-3.81,-3.81) 5(3.81,-3.81) 6(3.81,-1.27) 7(3.81,1.27) 8(3.81,3.81)
  silkscreen extent -3.94,-5.15 2.65,5.23, body extent -3.6,-5.15 3.6,5.15, height 4.58
PE16A [mm] "DIP, 16-Leads, Row Spacing 7.62mm, Pitch 2.54mm, Body 19.18x6.99mm"
  round 1.8 hole 0.9: 1(-3.81,8.89) 2(-3.81,6.35) 3(-3.81,3.81) 4(-3.81,1.27) 5(-3.81,-1.27) 6(-3.81,-3.81) 7(-3.81,-6.35) 8(-3.81,-8.89) 9(3.81,-8.89) 10(3.81,-6.35) 11(3.81,-3.81) 12(3.81,-1.27) 13(3.81,1.27) 14(3.81,3.81) 15(3.81,6.35) 16(3.81,8.89)
  silkscreen extent -3.94,-9.9 2.65,10.31, body extent -3.3,-9.9 3.3,9.9, height 5.08
RB_7.62mm [mm]
  round 1.8 hole 1: 1(3.81,0) 2(-3.81,0)
  silkscreen extent -6,-6 6,6
RELAY-SPDT-1 [mm]
  round 2.54 hole 1.5: 1(0,7.25) 2(-6,-7.25) 3(6,-7.25)
  round 2.54 hole 1: 4(-6,4.75) 5(6,4.75)
  silkscreen extent -8.36,-13.09 8.33,9.75, body extent -8.02,-10.1 7.98,9.9, height 15.58
SIP3 [mm]
  round 1.8 hole 1: 1(-2.54,0) 2(0,0) 3(2.54,0)
  silkscreen extent -3.81,-1.27 3.81,1.27
SOT-32 [mm]
  round 1.8 hole 1: B(6.25,1.5) C(3.875,1.5) E(1.5,1.5)
  silkscreen extent 0,0 7.8,3.25
SPST-2_2 [mm]
  round 1.8 hole 1: 1(-2.54,0) 2(2.54,0)
  silkscreen extent -3.56,-3.56 3.56,3.3, body extent -3,-3.2 3,3, height 4.3
TO92C [mm]
  round 1.8 hole 0.9: 1(0,2.54) 2(0,0) 3(0,-2.54)
  silkscreen extent -1.48,-2.61 3.02,2.61
TO220V#1 [mm]
  oval 1.8x2 hole 1.2: 1(-2.54,0) 2(0,0) 3(2.54,0)
  silkscreen extent -5.29,-1.48 5.29,3.18
TO220V#2 [mm]
  oval 1.8x2 hole 1: 1(-2.54,0) 2(0,0) 3(2.54,0)
  silkscreen extent -5.29,-1.48 5.29,3.18
VR4_ [mm]
  round 1.8 hole 0.9: 1(-2.54,0) 2(2.54,0) 3(0,0)
  silkscreen extent -4.54,-3.01 4.96,1.99
VR8-5/5.6MM [mm]
  round 1.8 hole 1: 1(-2.5,-2.5) 2(2.5,-2.5) 3(0,2.5)
  silkscreen extent -4,-4 4,4, body extent -3.13,-3.35 3.37,3.89, height 7.7
XTAL_1 [mm]
  round 1.8 hole 0.9: 1(-2.5,0) 2(2.58,0)
  silkscreen extent -5.02,-2 5.13,2, body extent -5.33,-1.52 5.33,1.52, height 3.39

## Part data
C1 "C17_U_PWM to DC1" "C17_U_PWM to DC2" C20 C21 C22 C23 C24: library part "Cap Pol1", "Polarized Capacitor (Radial)"
C2: library part Cap
C3 C4 C5 C6 C7 C8 C12 C13 C15 C17 C18 C25 C28: "Capacitor"
C9 C10 C11 C14 C16 C26 C27: "Polarized Capacitor (Radial)"
D1_U_Display_LED1 D1_U_Display_LED2 D1_U_Display_LED3 D1_U_Display_LED4 D1_U_Display_LED5 D1_U_Display_LED6 D1_U_Display_LED7 D1_U_Display_LED8: library part LED, "Typical INFRARED GaAs LED"
D3 D5 D11 D12 D13 D14: "Typical INFRARED GaAs LED"
D4: "Full Wave Diode Bridge"
D6 D8 D9 D10: library part Diode, "Default Diode"
D7 D16: "Zener Diode"
D15: "Default Diode"
J1: library part "Header 3", "Header, 3-Pin"
J2_U_Driver_SCR1 J2_U_Driver_SCR2 "J6_U_PWM to DC2": library part "Header 2", "Header, 2-Pin"
J3 J8 J11: "Header, 3-Pin"
J4 J7 J10 J12: "Header, 2-Pin"
J5: "Header, 6-Pin"
J9: "Receptacle Assembly, 9 Position, Right Angle"
J13: "Header, 4-Pin"
K1: "Switch"
K2_U_Key_Pull-up1 K2_U_Key_Pull-up2 K2_U_Key_Pull-up3 K2_U_Key_Pull-up4 K2_U_Key_Pull-up5: library part SW-PB, "Switch"
LS1: "Sounder"
Q1_U_Driver_SCR1 Q1_U_Driver_SCR2: library part BD139, "NPN Transistor"
Q2 Q8: "Silicon Bipolar Transistor"
Q3: library part IRFP141, "31A, 80V, 0.077 Ohm, N-Channel Power MOSFET"
Q4: library part PNP, "PNP Bipolar Transistor"
Q5 Q6 Q7 Q9: "NPN Bipolar Transistor"
R1 R10 R29 R31 R32 R36 R37 R38: library part Res1
R2 R3: "Potentiometer"
R4 R9 R11 R12 R13 R14 R15 R16 R17 R18 R19 R20 R21 R22 R24 R25 R26 R27 R28 R33 R34 R35 R40 R42 R43 R45 R46 R47 R48 R49 R50 R51 R52 R53: "Resistor"
R5_U_Display_LED1 R5_U_Display_LED2 R5_U_Display_LED3 R5_U_Display_LED4 R5_U_Display_LED5 R5_U_Display_LED6 R5_U_Display_LED7 R5_U_Display_LED8 R6_U_Driver_SCR1 R6_U_Driver_SCR2 R7_U_Driver_SCR1 R7_U_Driver_SCR2 R8_U_Driver_SCR1 R8_U_Driver_SCR2 "R23_U_PWM to DC1" "R23_U_PWM to DC2" R39_U_Key_Pull-up1 R39_U_Key_Pull-up2 R39_U_Key_Pull-up3 R39_U_Key_Pull-up4 R39_U_Key_Pull-up5: library part Res1, "Resistor"
R30: library part RPot1, "Potentiometer"
RL1: library part Relay-SPDT_2, "SPDT Relay"
U1: "8-Bit AVR Microcontroller with 16K Bytes of In-System Programmable Flash Memory"
U2_U_Driver_SCR1 U2_U_Driver_SCR2: library part Optoisolator
U3: "Low-Power, Slew-Rate-Limited RS-485/RS-422 Transceiver"
U5: library part 40106, "Hex inverting Schmitt trigger, 14-Pin"
U6 U10: "Dual Low-Power Operational Amplifier"
U9: "+5V Powered, Multi-Channel RS-232 Driver/Receiver"
VR1 VR2: "Voltage Regulator"
W1 W2 W3 W4 W5 W6: "Jumper Wire"
X1: library part XTAL, "Crystal Oscillator"

## Free pads (board coordinates)
  round 5 hole 3: 0(34.925,37.465) 0(222.25,37.465) 0(222.25,155.575)
  round 5 hole 4: 0(34.925,155.575)
  round 7 hole 4: 0(94.615,94.615) 0(137.795,94.615)
  round 1.8 hole 1.6: 1(39.37,56.515) 1(217.805,85.725) 2(39.37,71.755) 2(217.805,106.045)

## Nets (pads, with @x,y where several pads share a name; then routed paths per layer and width w, separated by ;. In a path a pad name is that pad's centre, name@x,y a point inside that pad or via, vN(x,y) a via of type N, cw(c..) or ccw(c..) an arc to the next point about the centre after c; other vN are vias at no path point)
+5V: C2.1 C6.1 C8.2 C10.1 C21.2 C25.1 D11.1 D12.1 D13.1 J1.1 J5.5 J13.2 L1.1 LCD1.2 R2.1 R3.2 R12.1 R25.1 R26.1 R30.2 R33.1 R39_U_Key_Pull-up1.1 R39_U_Key_Pull-up2.1 R39_U_Key_Pull-up3.1 R39_U_Key_Pull-up4.1 R39_U_Key_Pull-up5.1 U1.10 U3.8 U6.8 U9.16 VR1.3 | length 679.7
  Top Layer w0.5: J1.1@39.37,97.155 39.37,98.425 48.26,98.425 ; C2.1@45.085,89.535 47.625,89.535 48.26,90.17 48.26,98.425 ; R12.1@48.26,101.764 48.26,98.425 ; U9.16@48.26,125.095 50.165,125.095 50.8,124.46 50.82,124.46 C21.2@50.82,120.015 ; C21.2@50.8,119.995 50.8,116.84 51.435,116.205 53.34,116.205 53.975,115.57 53.975,103.124 ; U3.8@51.435,103.124 53.975,103.124 ; C6.1@53.975,99.949 53.975,103.124 ; R26.1@67.31,57.15 R26.1@67.31,57.695 ; R25.1@81.915,71.12 R25.1@82.005,71.12 R25.1@82.652,71.12 ; R25.1@82.535,71.237 R25.1@82.652,71.12 ; VR1.3@88.9,40.64 86.995,40.64 86.36,41.275 86.36,70.485 85.725,71.12 R25.1@82.652,71.12 ; R33.1@112.395,81.825 112.395,88.9 113.03,89.535 114.3,89.535 114.935,90.17 J5.5@114.935,95.25 U1.10@114.935,101.6 ; R39_U_Key_Pull-up1.1@139.79,88.9 140.97,88.9 140.97,70.485 141.82,69.635 R39_U_Key_Pull-up5.1@146.81,69.635 ; R2.1@168.392,151.765 R2.1@168.823,152.196 ; R2.1@168.95,151.725 170.855,151.725 171.45,151.13 171.45,137.16 172.085,136.525 J13.2@217.805,136.525
  Bottom Layer w0.5: C2.1@45.085,89.535 59.055,89.535 59.563,89.027 R30.2@59.563,81.788 ; C25.1@45.085,125.095 U9.16@48.26,125.095 ; D12.1@46.385,158.215 46.385,160.02 46.99,160.625 46.99,160.655 75.565,160.655 76.2,160.02 76.2,147.32 76.835,146.685 81.382,146.685 ; R12.1@48.26,101.764 48.26,102.489 48.895,103.124 U3.8@51.435,103.124 ; C21.2@50.82,120.015 50.82,118.745 51.435,118.13 83.185,118.13 83.8,118.745 83.82,118.745 83.82,133.35 84.455,133.985 ; R30.2@59.436,81.915 56.515,81.915 55.88,81.28 55.88,74.295 56.515,73.66 60.325,73.66 60.96,73.025 60.96,57.785 61.595,57.15 R26.1@67.31,57.15 ; D13.1@66.645,158.015 66.645,160.625 ; R26.1@67.31,57.695 R26.1@67.31,57.15 ; R25.1@81.915,71.12 81.915,66.675 U6.8@81.28,66.675 78.105,66.675 77.47,66.04 77.47,55.245 76.835,54.61 67.945,54.61 67.31,55.245 R26.1@67.31,57.15 ; R25.1@82.64,71.12 100.965,71.12 101.6,71.755 ; D11.1@88.8,64.165 88.8,71.02 ; VR1.3@88.9,40.64 C8.2@107.315,40.64 ; LCD1.2@96.455,156.098 96.455,158.815 95.885,159.385 84.455,159.385 83.82,158.75 83.82,151.815 81.915,151.815 81.382,151.282 81.382,146.685 ; R33.1@112.395,81.825 102.145,81.825 101.6,81.28 101.6,71.755 ; R39_U_Key_Pull-up3.1@116.75,64.135 R39_U_Key_Pull-up2.1@116.75,66.675 117.475,66.675 118.11,67.31 R39_U_Key_Pull-up4.1@118.11,69.635 ; R39_U_Key_Pull-up5.1@146.81,69.635 R39_U_Key_Pull-up4.1@118.11,69.635 ; R2.1@168.823,152.196 169.254,151.765 170.815,151.765 171.45,151.13 171.45,134.62 171.07,134.24 L1.1@117.475,134.24 117.22,133.985 84.455,133.985 ; 81.382,146.685 81.382,140.233 81.915,139.7 83.185,139.7 83.82,139.065 83.82,134.62 84.455,133.985 ; 101.6,71.755 102.235,71.12 117.475,71.12 118.11,70.485 R39_U_Key_Pull-up4.1@118.11,70.395 R39_U_Key_Pull-up4.1@118.11,69.635
+9V: C28.2 J13.3 Q2.1 U4.4 U5.14 VR1.1 VR2.3 | length 410.7
  Top Layer w0.5: U5.14@135.89,57.785 133.35,57.785 132.715,57.15 132.715,38.1 133.35,37.465 144.78,37.465 ; Q2.1@147.955,50.165 145.415,50.165 ; U4.4@166.37,37.465 144.78,37.465 ; J13.3@217.805,141.605 200.66,141.605 200.025,142.24 200.025,159.385 199.39,160.02 159.385,160.02 158.75,159.385 158.75,120.015 159.385,119.38 164.465,119.38 165.1,118.745 165.1,105.41 165.735,104.775 172.72,104.775 173.355,104.14 173.355,83.82 173.99,83.185 189.865,83.185 190.5,82.55 190.5,64.77 189.865,64.135 168.91,64.135 168.275,63.5 168.275,62.865 167.64,62.23 145.415,62.23 144.78,61.595 144.78,50.8 145.415,50.165 ; 144.78,37.465 144.78,49.53 145.415,50.165
  Bottom Layer w0.5: VR2.3@74.295,45.72 C28.2@81.915,45.72 VR1.1@88.9,45.72 88.9,47.625 89.535,48.26 110.49,48.26 111.125,48.895 111.17,48.895 111.17,54.193 111.155,54.208 111.155,60.325 111.76,60.93 113,60.93 113.03,60.96 135.255,60.96 135.89,60.325 U5.14@135.89,57.785
+12V: C7.2 C9.1 C12.2 C14.1 D4.3 D5.1 D15.2 D16.2 J13.4 L2.1 LS1.1 R16.1 R36.1 RL1.4 U10.8 VR2.1 | length 510
  Top Layer w0.5: VR2.1@74.295,40.64 74.295,37.465 74.93,36.83 108.585,36.83 109.22,37.465 LS1.1@109.22,53.34 ; L2.1@167.005,57.15 L2.1@167.005,57.875 ; R36.1@185.928,90.842 179.705,90.842 179.107,91.44 179.107,106.717 179.705,107.315 196.215,107.315 196.85,107.95 ; U10.8@193.167,123.952 191.77,123.952 191.135,123.317 191.135,114.91 191.77,114.275 195.58,114.275 196.19,113.665 196.215,113.665 196.215,108.585 196.85,107.95 ; D16.2@203.327,117.602 204.978,117.602 205.74,116.84 205.74,108.585 ; J13.4@217.805,146.685 223.52,146.685 224.155,146.05 224.155,108.585 223.52,107.95 206.375,107.95 205.74,108.585 ; 196.85,107.95 205.105,107.95 205.74,108.585
  Bottom Layer w0.5: D4.3@46.275,35.846 46.275,35.64 46.355,35.56 53.975,35.56 54.61,36.195 C9.1@54.61,39.41 54.61,40.045 55.205,40.64 VR2.1@74.295,40.64 74.295,34.925 74.93,34.29 170.18,34.29 170.815,34.925 170.815,56.515 170.18,57.15 L2.1@167.005,57.15 ; C7.2@62.865,40.73 62.865,34.915 63.5,34.28 D5.1@64.74,34.28 ; LS1.1@109.22,53.34 109.22,58.42 109.855,59.055 109.855,61.595 110.49,62.23 166.37,62.23 167.005,62.865 167.005,64.135 167.64,64.77 178.435,64.77 179.07,65.405 179.07,90.17 179.705,90.805 179.705,90.842 R36.1@185.928,90.842 D15.2@189.23,90.842 ; C14.1@151.13,58.4 C12.2@157.48,58.4 ; C12.2@157.48,58.42 R16.1@161.29,58.42 ; R16.1@161.29,58.51 166.37,58.51 L2.1@167.005,57.875 ; D15.2@189.103,90.932 190.023,90.012 RL1.4@197.053,90.012